# Altium PCB Wi_Drive_V1.5PcbDoc.PcbDoc
Units mil, origin at the board's own origin, x right, y up, seen from the top; angles counter-clockwise.
Board outline 668.38 x 1498.54 mil, 4 copper layers (Top Layer 1, GND, PWR, Bottom Layer 1), stack 39.337 mil thick; 50 components, 43 nets, 218 pads, 261 vias.
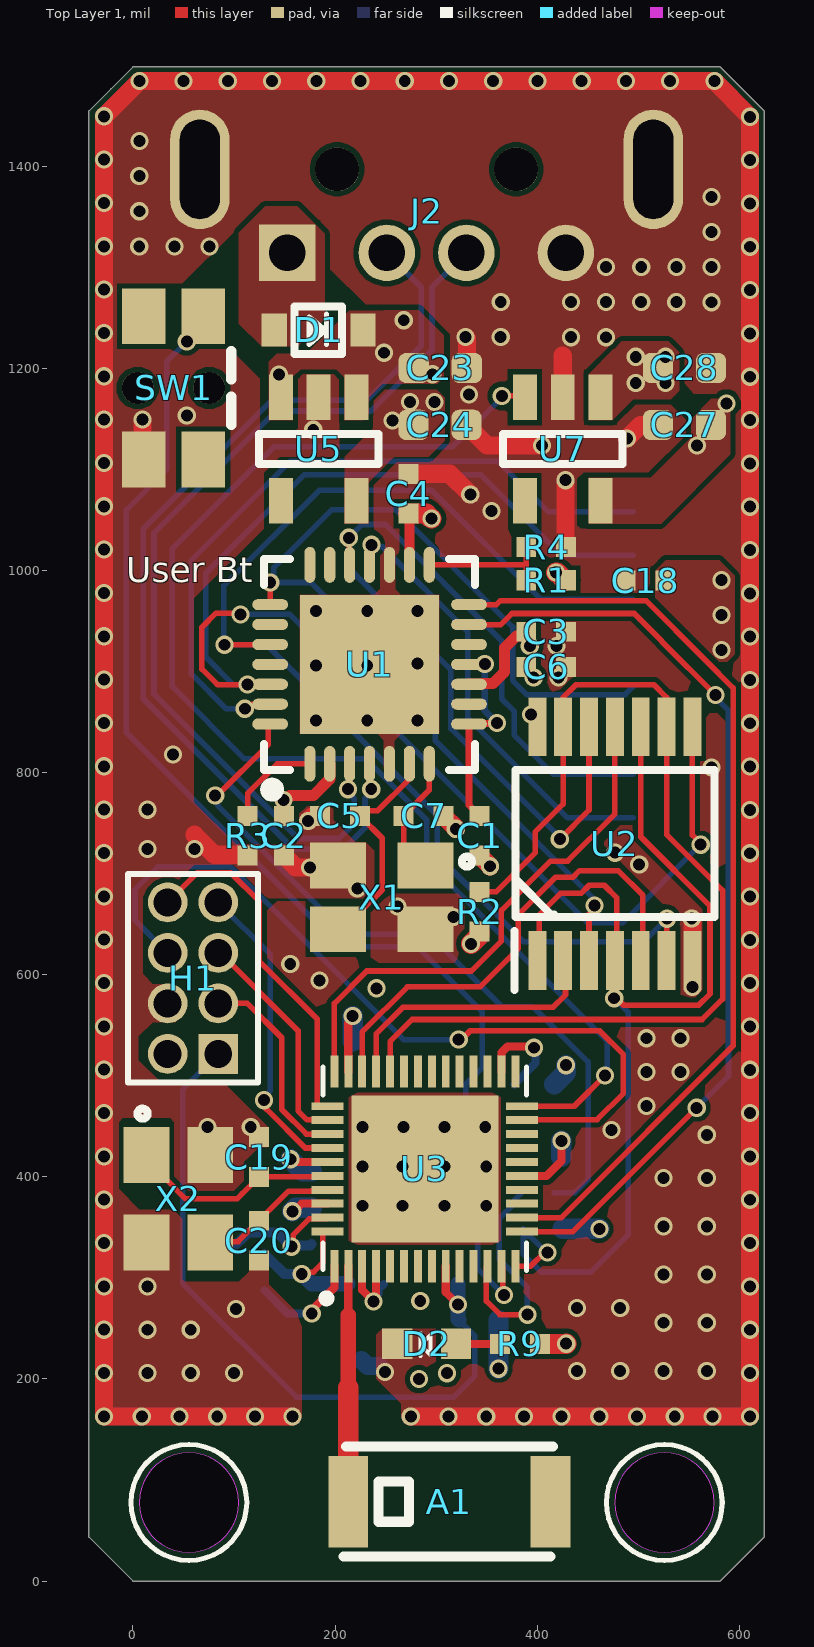
[diagram p0: Top Layer 1 view]
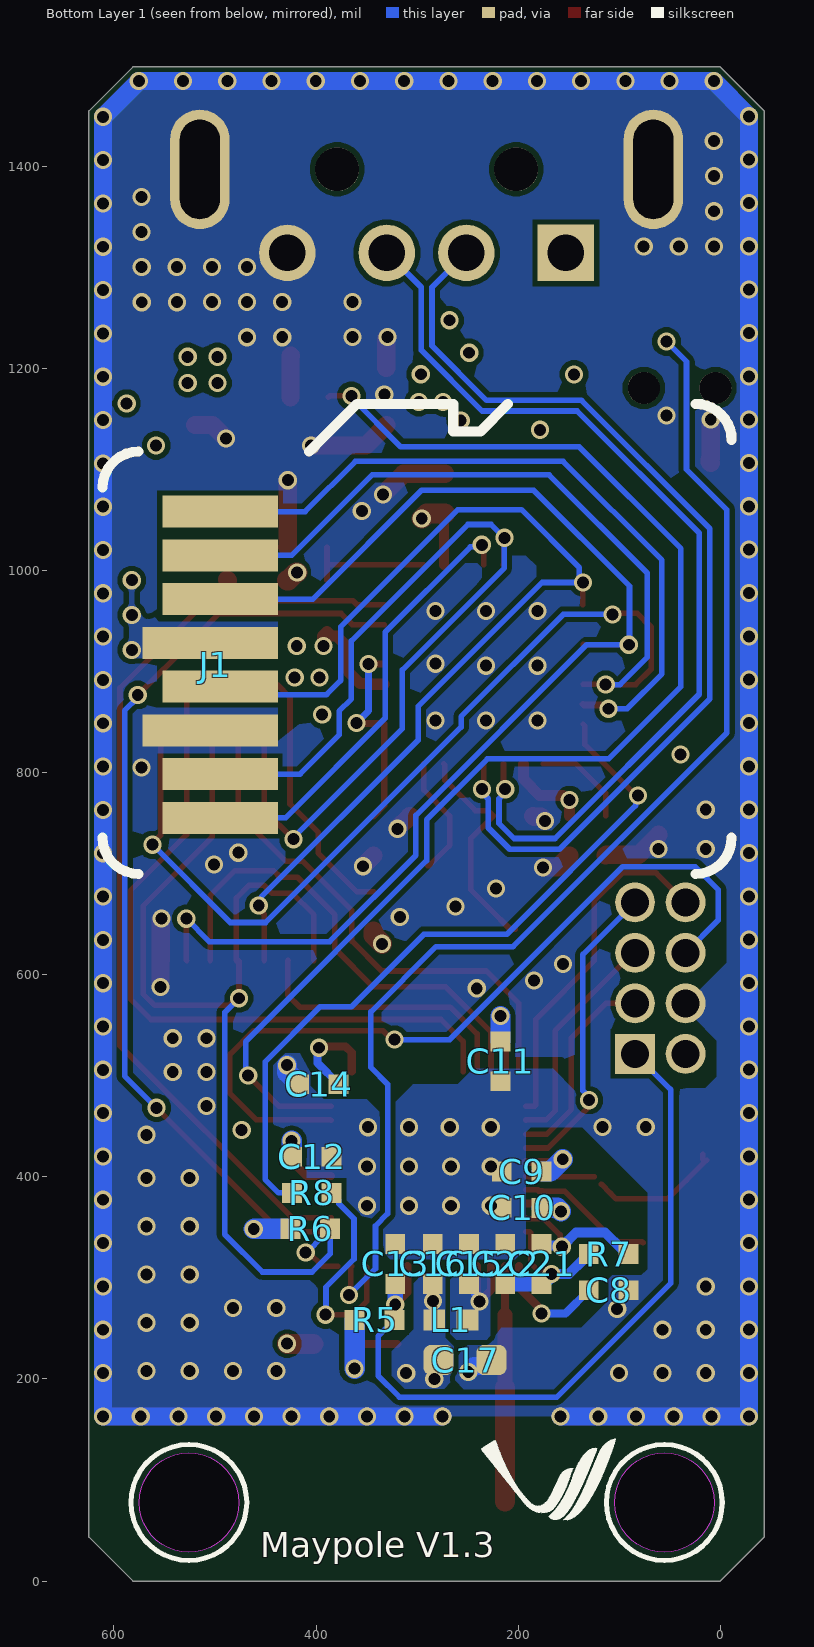
[diagram p1: Bottom Layer 1 view, seen from below]
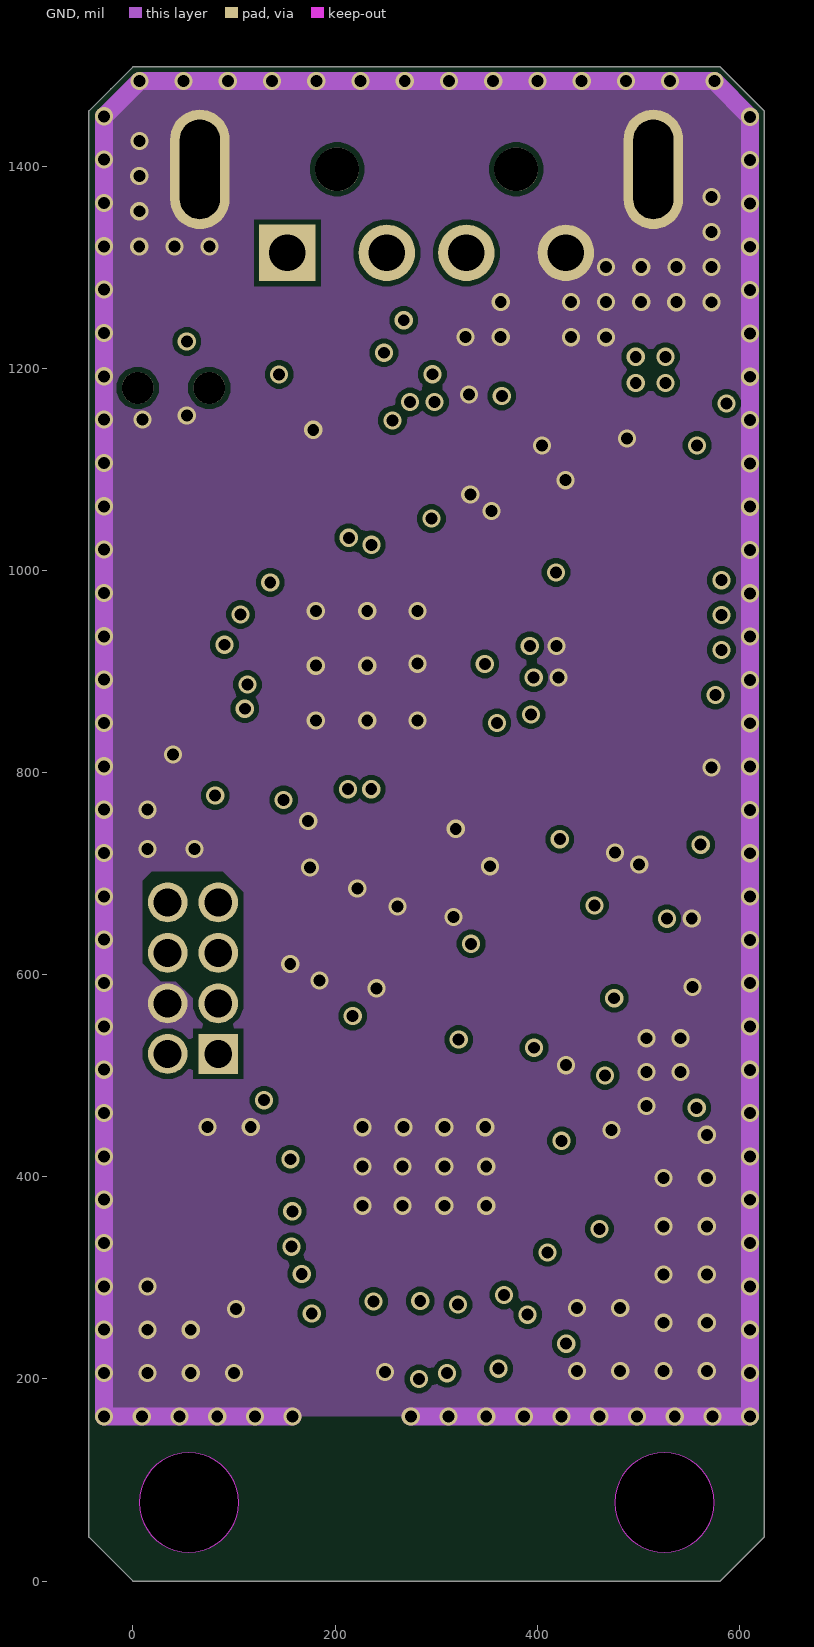
[diagram p2: GND]
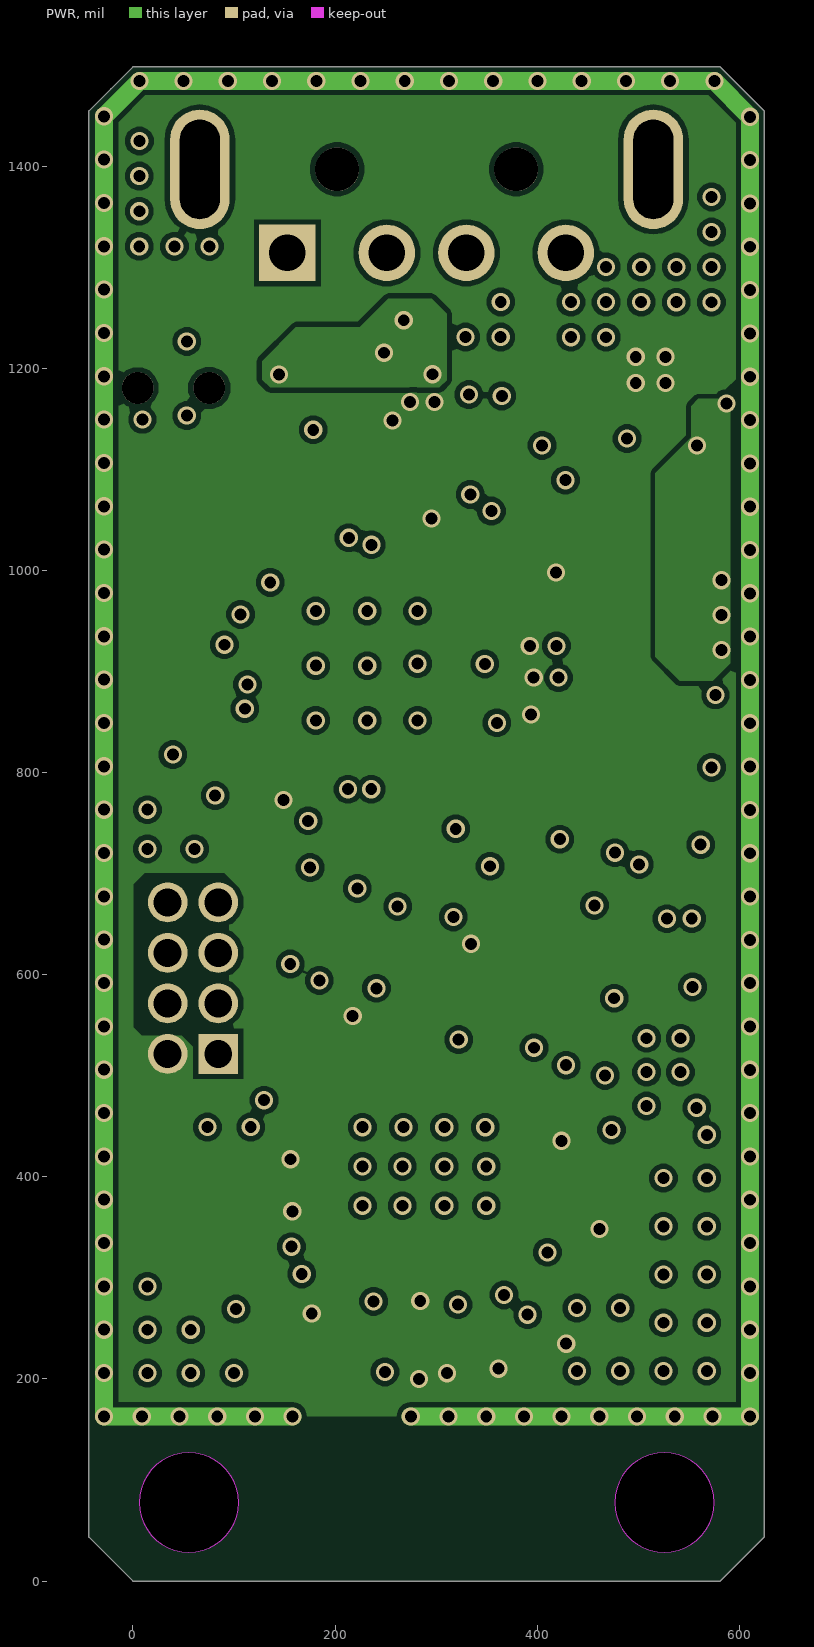
[diagram p3: PWR]
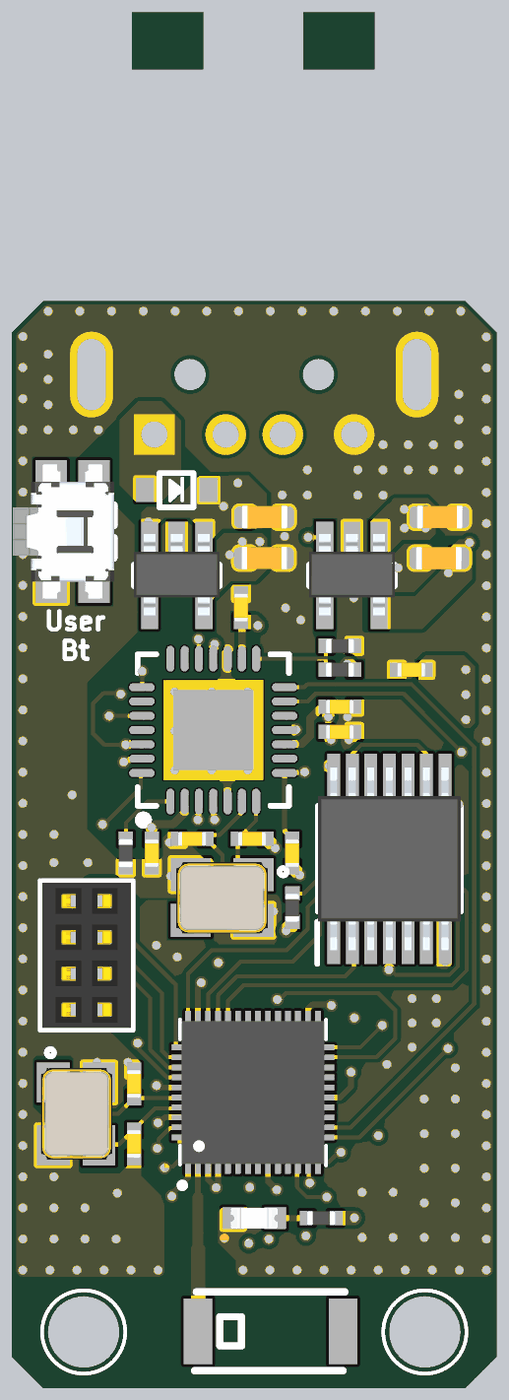
[diagram p4: 3D render of the assembled board from above, using the file's embedded part models]
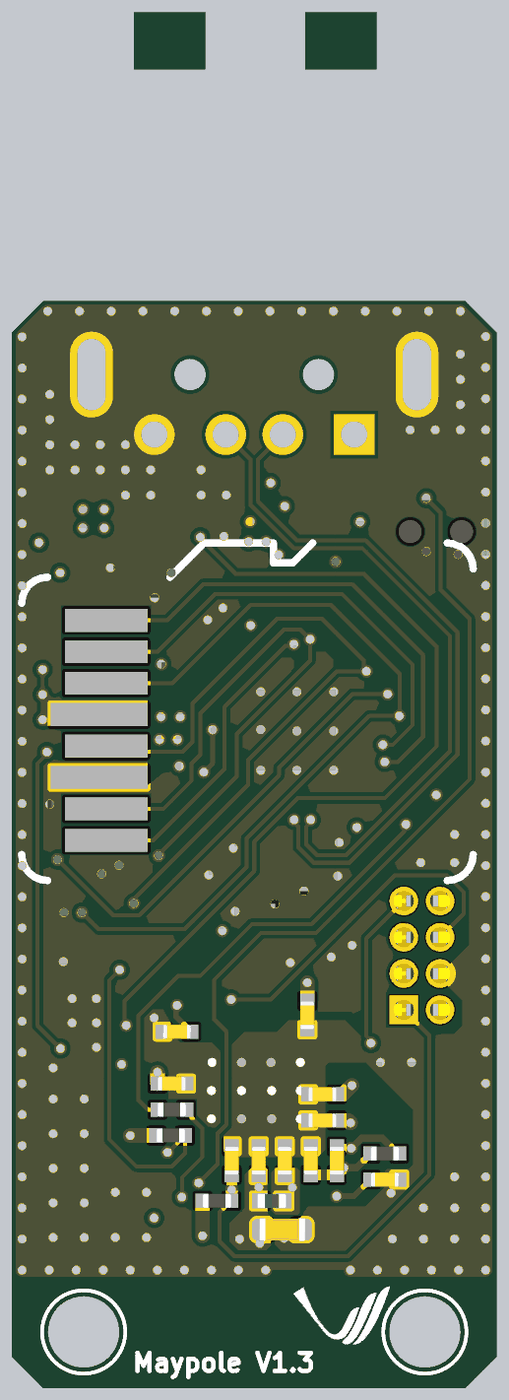
[diagram p5: 3D render of the assembled board from below, using the file's embedded part models]

## Layer stack, top to bottom
Top Solder: solder mask 0.4, Solder Resist, Dk 3.8
Top Layer 1: signal copper 1.378
Dielectric 2: prepreg 3.913, PP-006, Dk 4.1
GND: signal copper 0.598
Dielectric 1: dielectric 27.559, FR-4, Dk 4.6
PWR: signal copper 0.598
Dielectric 3: prepreg 3.913, PP-006, Dk 4.1
Bottom Layer 1: signal copper 1.378
Bottom Solder: solder mask 0.4, Solder Resist, Dk 3.8

## Board outline
-43.59,43.59 -43.59,1454.95 -21.79,1476.75 0,1498.54 581.21,1498.54 624.79,1454.95 624.79,43.59 581.21,0 0,0
cut-out: 476.67,77.75 ccw(c525.88,77.75) 525.88,28.54 ccw(c525.88,77.75) 575.09,77.75 ccw(c525.88,77.75) 525.88,126.97 ccw(c525.88,77.75)
cut-out: 6.11,77.75 ccw(c55.32,77.75) 55.32,28.54 ccw(c55.32,77.75) 104.53,77.75 ccw(c55.32,77.75) 55.32,126.97 ccw(c55.32,77.75)
cut-out: 121.87,1817.99 121.87,1896.73 220.29,1896.73 220.29,1817.99
cut-out: 358.09,1817.99 358.09,1896.73 456.51,1896.73 456.51,1817.99

## Design rules (kind name [scope] priority, off if disabled: settings)
BoardOutlineClearance [All] p1: gap=5 ignorepadtopadclearanceinfootprint=FALSE
Clearance [All] p1: gap=5 ignorepadtopadclearanceinfootprint=FALSE
DiffPairsRouting DiffPairs_usb [InDifferentialPairClass('USB')] p1: maxlimit=10 minlimit=5 mostfreqgap=10 toplayer_maxgap=5 toplayer_prefgap=5 toplayer_minwidth=5.6 toplayer_maxwidth=5.6 toplayer_prefwidth=5.6 bottomlayer_maxgap=5 bottomlayer_prefgap=5 bottomlayer_minwidth=5.6 bottomlayer_maxwidth=5.6 bottomlayer_prefwidth=5.6 impedanceprofiledriven=TRUE impedanceprofileid={67B5BE60-626A-4F86-828E-9287B560A71A} impedanceprofilevalue=90.000000 maxuncoupledlength=500
MatchedLengths MatchedLengths_SD [InxSignalClass('SD_card')] p1: tolerance=1000 checknetsindiffpair=FALSE checkdiffpairvsdiffpair=TRUE checkxsignals=TRUE checkothers=TRUE
MatchedLengths DiffPair_usb [InDifferentialPairClass('USB')] p2: tolerance=1000 checknetsindiffpair=TRUE checkdiffpairvsdiffpair=FALSE checkxsignals=FALSE checkothers=FALSE
MinimumSolderMaskSliver [All] p1: minsoldermaskwidth=0
PolygonConnect [All] p1: connectstyle=Direct reliefconductorwidth=10 reliefentries=4 polygonreliefangle="90 Angle" airgapwidth=10
RoutingVias [All] p1: holewidth=28 width=50 viastyle="Through Hole" minholewidth=11.81 minwidth=17.99 maxholewidth=28 maxwidth=50
SilkToSolderMaskClearance [IsPad] p1: minsilkscreentomaskgap=0 clearancetoexposedcopper=TRUE
SolderMaskExpansion [All] p1: expansion=4 istentingtop=FALSE
Width Width_sd [Not InNetClass('USB')] p1: maxlimit=20 minlimit=5.5 preferedwidth=10 toplayer_prefwidth=5.5 bottomlayer_prefwidth=5.5 impedanceprofiledriven=TRUE impedanceprofileid={71BB4B25-FDDE-479C-ABF6-678D2CCB89EB} impedanceprofilevalue=50.000000 minimp=50.000000 maximp=50.000000 favimp=50.000000
27 further rules are at their usual default settings.

## Classes and differential pairs
differential pair class USB: USB
net class USB: USB_N USB_P
net class SD_Card: SD_CLK SD_CS/D3 SD_D1 SD_D2 SD_MISO/D0 SD_MOSI/CMD
component class Microcontroller: A1 C1 C2 C3 C4 C5 C6 C7 C8 C9 C10 C11 C12 C13 C14 C15 C16 C17 C18 C19 C20 C21 C22 H1 J1 L1 R1 R2 R3 R4 R5 R6 R7 R8 SW1 U1 U2 U3 X1 X2
component class "Maypole Power": C23 C24 C27 C28 D1 D2 J2 R9 ss U5 U7
differential pair USB: +USB_P -USB_N

## Components (designator, comment, footprint, x,y, rotation, side; value= is the part's Value field where it differs from the comment)
A1 "Ant" ANT-SMD_L5.2-W2.1 313.09,78.68 r0 top
C1 "" CAPC0402 343.1,737.64 r270 top value=1uF
C2 "" CAPC0402 149.33,737.64 r270 top value=100nF
C3 "" CAPC0402 408.87,939.55 r0 top value=100nF
C4 "" CAPC0402 272.51,1076.16 r90 top value=100nF
C5 "" CAPC0402 204.88,757.32 r180 top value=22pF
C6 "" CAPC0402 408.87,904.69 r0 top value=100nF
C7 "" CAPC0402 287.56,757.32 r0 top value=22pF
C8 "" CAPC0402 110.4,287.78 r180 bottom value=100nF
C9 "" CAPC0402 196.57,405.29 r0 bottom value=100nF
C10 "" CAPC0402 196.57,369.42 r0 bottom value=100nF
C11 "" CAPC0402 217.46,514.32 r270 bottom value=100nF
C12 "" CAPC0402 404.29,420 r180 bottom value=100nF
C13 "" CAPC0402 321.65,313.88 r90 bottom value=100nF
C14 "" CAPC0402 397.29,491.73 r0 bottom value=1uF
C15 "" CAPC0402 248.61,313.88 r90 bottom value=100nF
C16 "" CAPC0402 284.47,313.88 r90 bottom value=100nF
C17 "" CAPC0603 252.56,218.74 r180 bottom value=10uF
C18 "" CAPC0402 507.11,990.26 r180 top value=100nF
C19 "" CAPC0402 124.72,419.65 r90 top value=10pF
C20 "" CAPC0402 124.72,336.98 r270 top value=10pF
C21 "" CAPC0402 176.88,313.88 r270 bottom value=3.3nF
C22 "" CAPC0402 212.75,313.88 r90 bottom value=10nF
C23 "" CAPC0603 304.22,1200.65 r0 top value=10uF
C24 "" CAPC0603 303.93,1144.25 r0 top value=10uF
C27 "" CAPC0603 545.81,1144.22 r180 top value=10uF
C28 "" CAPC0603 545.81,1200.65 r0 top value=10uF
D1 "" SOD-323 183.73,1238.26 r0 top
D2 "" LED_0603 290.6,234.74 r180 top locked
H1 "Header 8" HEADER_1X08_2.0 59.34,596.71 r90 top
J1 "DM3AT-SF-PEJM5(40)" 473521001 497.83,906.9 r90 bottom
J2 "" Molex_48037-0001_0 290.6,1355.84 r180 top locked
L1 "" IND_0402 266.49,258.43 r0 bottom
R1 "" RESC0402 408.87,990.41 r180 top value=10k
R2 "" RESC0402 343.1,662.41 r270 top value=10K
R3 "" RESC0402 113.47,737.64 r90 top value=680E
R4 "" RESC0402 408.87,1023.28 r180 top value=10k
R5 "" RESC0402 342.1,258.47 r0 bottom value=10K
R6 "" RESC0402 405.74,348.6 r0 bottom value=10K
R7 "" RESC0402 110.4,323.64 r180 bottom value=20K
R8 "" RESC0402 404.29,384.14 r0 bottom value=0E
R9 "" RESC0402 383,234.74 r0 top value=2K
SW1 "Button" "RIGHT ANGLE PUSH BUTTON SMD" 40.14,1180.8 r270 top locked
U1 "" AU6465RB63-GCF-GR 234.17,907.26 r0 top
U2 "" 74ABT125PW 476.94,729.86 r90 top
U3 "" QFN48_5X5 288.88,407.93 r90 top
U5 "" SOT25 183.73,1120.45 r270 top
U7 "" SOT25 425.31,1120.45 r270 top
X1 "" CRYSTAL_3225 246.22,676.6 r180 top
X2 "" Crystal_3225 44.92,378.32 r270 top

## Footprints (in the part's own frame and the unit in brackets; to place one, negate y for a bottom-side part, rotate by r counter-clockwise, add the part's x,y. Pads: shape width x height; smd on the part's side, far side on the other; paste and mask are expansions set on the pad)
74ABT125PW [mm]
  rect 1.475x0.45 smd: 1(-2.938,1.95) 2(-2.938,1.3) 3(-2.938,0.65) 4(-2.938,0) 5(-2.938,-0.65) 6(-2.938,-1.3) 7(-2.938,-1.95) 8(2.938,-1.95) 9(2.938,-1.3) 10(2.938,-0.65) 11(2.938,0) 12(2.938,0.65) 13(2.938,1.3) 14(2.938,1.95)
  silkscreen extent -3.67,-2.5 1.85,2.52, body extent -3.2,-2.5 3.2,2.5, height 1.1
473521001 [mm]
  rect 0.8x2.9 smd: 1(3.849,-0.075) 2(2.75,-0.075) 3(1.65,-0.075) 5(-0.55,-0.075) 7(-2.75,-0.075) 8(-3.849,-0.075)
  rect 0.8x3.4 smd: 4(0.55,0.175) 6(-1.65,0.175)
  silkscreen extent -5.26,-12.93 6.56,2.88, body extent -4.89,-12.57 6.11,2.43, height 1
ANT-SMD_L5.2-W2.1 [mm]
  rect 1x2.3 smd: 1(-2.54,0) 2(2.54,0)
  silkscreen extent -2.66,-1.38 2.6,1.38, body extent -2.6,-1.05 2.6,1.05, height 1
AU6465RB63-GCF-GR [mm]
  oval 0.28x0.9 smd paste-100 mask+0.051: 1(-1.501,-2.5) 2(-1.001,-2.5) 3(-0.501,-2.5) 4(0,-2.5) 5(0.5,-2.5) 6(1.001,-2.5) 7(1.501,-2.5) 15(1.501,2.5) 16(1.001,2.5) 17(0.5,2.5) 18(0,2.5) 19(-0.501,2.5) 20(-1.001,2.5) 21(-1.501,2.5)
  oval 0.9x0.28 smd paste-100 mask+0.051: 8(2.5,-1.501) 9(2.5,-1.001) 10(2.5,-0.501) 11(2.5,0) 12(2.5,0.5) 13(2.5,1.001) 14(2.5,1.501) 22(-2.5,1.501) 23(-2.5,1.001) 24(-2.5,0.5) 25(-2.5,0) 26(-2.5,-0.501) 27(-2.5,-1.001) 28(-2.5,-1.501)
  rect 3.5x3.5 smd paste-100 mask+0.051: 29(0,0)
  silkscreen extent -2.65,-3.3 2.65,2.65, body extent -2.65,-2.65 2.65,2.65, height 0.8
CAPC0402 [mm]
  rect 0.5x0.5 smd: 1(-0.5,0) 2(0.5,0)
  body extent -0.5,-0.25 0.5,0.25, height 0.56
CAPC0603 [mil]
  rrect50% 30x30 smd: 1(-26.26,0) 2(26.26,0)
  body extent -31,-16 32,16, height 34
CRYSTAL_3225 [mm] "3225 pack"
  rect 1.4x1.15 smd: 1(-1.1,-0.8) 2(1.1,-0.8) 3(1.1,0.8) 4(-1.1,0.8)
  silkscreen extent -2.27,-1.03 -2.01,-0.77, body extent -1.6,-1.23 1.6,1.27, height 0.6
Crystal_3225 [mm] "3225 pack"
  rect 1.4x1.15 smd: 1(-1.1,-0.8) 2(1.1,-0.8) 3(1.1,0.8) 4(-1.1,0.8)
  silkscreen extent -2.27,-1.03 -2.01,-0.77, body extent -1.6,-1.23 1.6,1.27, height 0.6
HEADER_1X08_2.0 [mm]
  rect 1x1 hole 0.7 paste+0 mask+0.05: 1(-1.905,-0.635)
  round 1 hole 0.7 paste+0 mask+0.05: 2(-1.905,0.635) 3(-0.635,-0.635) 4(-0.635,0.635) 5(0.635,-0.635) 6(0.635,0.635) 7(1.905,-0.635) 8(1.905,0.635)
  silkscreen extent -2.62,-1.64 2.62,1.63, body extent -2.54,-1.55 2.54,1.55, height 4.4
IND_0402 [mm]
  rect 0.55x0.53 smd: 1(0.419,0) 2(-0.419,0)
  body extent -0.5,-0.25 0.5,0.25, height 0.55
LED_0603 [mil]
  rect 30x30 smd: A(-29.02,0) K(29.02,0)
  silkscreen extent -4,-11 6,12, body extent -32,-14 32,14, height 25
Molex_48037-0001_0 [mm]
  rect 1.42x1.42 hole 0.92 paste-1000 mask+0: 1(3.5,1.05)
  round 1.42 hole 0.92 paste-1000 mask+0: 2(1,1.05) 3(-1,1.05) 4(-3.5,1.05)
  oval 1.5x3 hole 1 slot 2.5 at 90 deg paste-1000 mask+0: 5(-5.7,-1.05) 6(5.7,-1.05)
  round 1.1 hole 1.1 unplated paste-1000 mask+0: ""(-2.25,-1.05) ""(2.25,-1.05)
  body extent -6.3,-18.76 6.3,1.16, height 3
QFN48_5X5 [mm] "Esp32 dowd SoC"
  rect 0.81x0.2 smd: 1(-2.445,2.275) 2(-2.445,1.925) 3(-2.445,1.575) 4(-2.445,1.225) 5(-2.445,0.875) 6(-2.445,0.525) 7(-2.445,0.175) 8(-2.445,-0.175) 9(-2.445,-0.525) 10(-2.445,-0.875) 11(-2.445,-1.225) 12(-2.445,-1.575) 13(-2.445,-1.925) 14(-2.445,-2.275) 25(2.445,-2.275) 26(2.445,-1.925) 27(2.445,-1.575) 28(2.445,-1.225) 29(2.445,-0.875) 30(2.445,-0.525) 31(2.445,-0.175) 32(2.445,0.175) 33(2.445,0.525) 34(2.445,0.875) 35(2.445,1.225) 36(2.445,1.575) 37(2.445,1.925) 38(2.445,2.275)
  rect 0.2x0.81 smd: 15(-1.575,-2.445) 16(-1.225,-2.445) 17(-0.875,-2.445) 18(-0.525,-2.445) 19(-0.175,-2.445) 20(0.175,-2.445) 21(0.525,-2.445) 22(0.875,-2.445) 23(1.225,-2.445) 24(1.575,-2.445) 39(1.575,2.445) 40(1.225,2.445) 41(0.875,2.445) 42(0.525,2.445) 43(0.175,2.445) 44(-0.175,2.445) 45(-0.525,2.445) 46(-0.875,2.445) 47(-1.225,2.445) 48(-1.575,2.445)
  rect 3.7x3.7 smd paste-3: 49(0,0)
  silkscreen extent -3.35,-2.56 2.56,2.57, body extent -2.5,-2.5 2.5,2.5, height 0.9
RESC0402 [mm]
  rect 0.5x0.508 smd: 1(0.5,0) 2(-0.5,0)
  body extent -0.5,-0.25 0.5,0.25, height 0.4
"RIGHT ANGLE PUSH BUTTON SMD" [mm]
  rect 1.4x1.1 smd: 1(-1.8,0.75) 2(1.8,0.75) 3(-1.8,-0.75) 4(1.8,-0.75)
  round 0.8 hole 0.8 unplated: ""(0,0.9) ""(0,-0.9)
  silkscreen extent -0.92,1.45 0.92,1.45, body extent -2.35,-2.1 2.35,1.45, height 1.35
SOD-323 [mm]
  rect 0.63x0.83 smd: A(-1.115,0) K(1.115,0)
  silkscreen extent -0.61,-0.61 0.58,0.58, body extent -1.25,-0.62 1.25,0.63, height 0.99
SOT25 [mm]
  rect 1.15x0.6 smd: 1(-1.3,0.95) 2(-1.3,0) 3(-1.3,-0.95) 4(1.3,-0.95) 5(1.3,0.95)
  silkscreen extent -0.38,-1.5 0.38,1.5, body extent -1.45,-1.5 1.4,1.5, height 1.3

## Part data
A1: "SMD,2.1x5.2mm Antennas ROHS", Case/Package=SMD, Manufacturer Part Number=SLDA52-2R710G-S1TF
C1 C14: library part Cap, "CAP CER 1uF 6.3V X7R 0402", Case/Package=0402, Dielectric=X7R, Voltage=6.3V
C2 C3 C4 C6 C8 C9 C10 C11 C12 C13 C15 C16 C18: library part Cap, "CAP CER 100nF 6.3V X7R 0402", Case/Package=0402, Dielectric=X7R, Voltage=6.3V
C5 C7: library part Cap, "CAP CER 22pF 50V X7R 0402", Case/Package=0402, Dielectric=X7R, Voltage=50V, DNP=DNP
C17 C23 C24 C27 C28: library part Cap, "CAP CER 10uF 6.3V X7R 0603", Case/Package=0603, Dielectric=X7R, Voltage=6.3V
C19 C20: library part Cap, "CAP CER 10pF 50V X7R 0402", Case/Package=0402, Dielectric=X7R, Voltage=50V
C21: library part Cap, "CAP CER 3.3nF 6.3V X7R 0402", Case/Package=0402, Dielectric=X7R, Voltage=6.3V
C22: library part Cap, "CAP CER 10nF 6.3V X7R 0402", Case/Package=0402, Dielectric=X7R, Voltage=6.3V
D1: library part B5817WS, "20V 1A 450mV @ 1A SOD-323 Schottky Barrier Diodes (SBD) RoHS", Case/Package=SOD-323, Manufacturer Part Number=B5817WS
D2: library part LED1, "LED, RED,SMD, 0603", Case/Package=0603, Manufacturer Part Number="LED, RED,SMD, 0603"
H1: "Header, 08-Pin,2mm", Case/Package=TH, Manufacturer Part Number="1.27mm PITCH", LatestRevisionDate=17-Jul-2002
J1: "Micro SD Memory Card Socket", Case/Package=SMD
J2: library part "USB MALE", "USB A-type Plug Male PCB R/A", Case/Package=TH, Manufacturer Part Number=USB-05
L1: library part Inductor, "2nH ±0.3nH 900mA 120mΩ 0402 Inductors (SMD) RoHS", Case Code (Imperial)=0402, Case Code (Metric)=1005, Current=900mA, DC Resistance (DCR)=120mR, Inductance=2nH, Manufacturer 1=Murata, Manufacturer Part Number=LQG15HN2N0S02D, Max Operating Temperature=125°C, Min Operating Temperature=-55°C, Package Quantity=10000, Self Resonant Frequency=6GHz, Supplier Part Number 1=C97984, Test Frequency=100MHz, Case/Package=0402, Category 1="Fixed Inductors", ComponentLink1Description=https://datasheet.ciiva.com/11799/0900766b8090d3b8-11799042.pdf?src-supplier=RSComponents, ComponentLink1URL=https://datasheet.ciiva.com/11799/0900766b8090d3b8-11799042.pdf?src-supplier=RSComponents, ComponentLink2Description=https://datasheet.ciiva.com/4976/o05e-4976477.pdf?src-supplier=Mouser, ComponentLink2URL=https://datasheet.ciiva.com/4976/o05e-4976477.pdf?src-supplier=Mouser, ComponentLink3Description=https://datasheet.ciiva.com/8510/l0075s0083lqg15hn-8510907.pdf?src-supplier=Avnet, ComponentLink3URL=https://datasheet.ciiva.com/8510/l0075s0083lqg15hn-8510907.pdf?src-supplier=Avnet, ComponentLink4Description=https://datasheet.ciiva.com/17279/l0075s0083lqg15hn-17279196.pdf?src-supplier=Avnet+Europe, ComponentLink4URL=https://datasheet.ciiva.com/17279/l0075s0083lqg15hn-17279196.pdf?src-supplier=Avnet+Europe, Core Material=Air, Current Rating=900mA, DC Current=900mA, Depth=0.55mm, Description 1="Fixed Inductors 0402 2.0nH", Height=0.5mm, Height - Seated (Max)=0.022inch, Length=1mm, Max DC Current=900mA, Military Standard=Not, Mount="Surface Mount", Number of Pins=2, Packaging="Tape and Reel", Pricing 1="50=0.00840, 500=0.00620, 1500=0.00580, 5000=0.00540, 25000=0.00520, 50000=0.00520, 50=0.00810, 500=0.00600, 1500=0.00560, 5000=0.00520, 25000=0.00500, 50000=0.00500, 50=0.04180, 500=0.03090, 1500=0.02890, 5000=0.02690, 25000=0.02600, 50000=0.02550, 50=0.03860, 500=0.02850, 1500=0.02670, 5000=0.02480, 25000=0.02400, 50000=0.02360, 50=0.00520, 500=0.00380, 1500=0.00360, 5000=0.00330, 25000=0.00320, 50000=0.00320, 50=0.00480, 500=0.00350, 1500=0.00330, 5000=0.00310, 25000=0.00300, 50000=0.00290, 50=0.04770, 500=0.03530, 1500=0.03300, 5000=0.03070, 25000=0.02970, 50000=0.02920, 50=0.65070, 500=0.48080, 1500=0.44960, 5000=0.41830, 25000=0.40450, 50000=0.39760, 50=0.02550, 500=0.01880, 1500=0.01760, 5000=0.01640, 25000=0.01580, 50000=0.01560, 50=0.46320, 500=0.34230, 1500=0.32010, 5000=0.29780, 25000=0.28800, 50000=0.28310, 50=0.05400, 500=0.03990, 1500=0.03730, 5000=0.03470, 25000=0.03360, 50000=0.03300, 50=0.00840, 500=0.00620, 1500=0.00580, 5000=0.00540, 25000=0.00520, 50000=0.00510, 50=0.00616, 500=0.00455, 1500=0.00426, 5000=0.00396, 25000=0.00383, 50000=0.00376 (AUD)", Q Factor=8, Radiation Hardening=No, REACH SVHC="No SVHC", RoHS 1=Yes, Shielding=Unshielded, Stock 1=84500, Supplier 1=LCSC, Termination=SMD/SMT, Width=0.02inch
R1 R4: library part Resistor, "Thick Film Resistor -  10kohm, 1%, 0402", Case/Package=0402, DNP=DNP
R2 R5 R6: library part Resistor, "Thick Film Resistor -  10Kohm, 1%, 0402", Case/Package=0402
R3: library part Resistor, "Thick Film Resistor -  680ohm, 1%, 0402", Case/Package=0402
R7: library part Resistor, "Thick Film Resistor -  20Kohm, 1%, 0402", Case/Package=0402
R8: library part Resistor, "Thick Film Resistor -  0ohm, 1%, 0402", Case/Package=0402
R9: library part Resistor, "Thick Film Resistor -  2Kohm, 1%, 0402", Case/Package=0402
SW1: "6mm 5mm Round Button 50mA Straight 6mm SPST 12V Plugin Tactile Switches ROHS", Case/Package=SMD, Manufacturer Part Number=TS-1809SM-C
U1: library part AU6465RB63-GCF-GR, "Controller QFN-28-EP(5x5) USB ICs ROHS", Case/Package=QFN-28-EP(5x5), Manufacturer Part Number=AU6465RB63-GCF-GR
U2: library part 74ABT125PW_112, "Buffers & Line Drivers QUAD BUFFER 3-S", Case/Package=14-TSSOP, Manufacturer Part Number=74ABT125PW,112, Manufacturer_Name=Nexperia
U3: library part ESP32-D0WD, "MCU Bluetooth, WiFi - 2.4GHz 48-QFN", Case/Package=48-QFN, Manufacturer="Espressif Systems", Manufacturer Part Number=ESP32U4WDH
U5 U7: library part LDO_5V_3V, "LDO Voltage Regulators 600mA CMOS LDO 50mA 3.3V 250mV", Case/Package=SOT-23-5, Manufacturer Part Number=AP2112K-3.3TRG1
X1: library part "CRYSTAL (7M-25.000MEEQ-T)", "12MHz ±25ppm Crystal 12pF 120 Ohms 4-SMD, No Lead", Case/Package=SMD/SMT, Manufacturer Part Number=ECS-120-20-33-TR, ComponentLink1Description=https://www.verical.com/server-webapp/html/getDatasheet?partID=757227&src-supplier=Verical, ComponentLink1URL=https://www.verical.com/server-webapp/html/getDatasheet?partID=757227&src-supplier=Verical, ComponentLink2Description=http://www.txccrystal.com/images/pdf/7m-accuracy.pdf?src-supplier=Digi-Key, ComponentLink2URL=http://www.txccrystal.com/images/pdf/7m-accuracy.pdf?src-supplier=Digi-Key, ComponentLink3Description=http://www.farnell.com/datasheets/1794111.pdf?src-supplier=Element14, ComponentLink3URL=http://www.farnell.com/datasheets/1794111.pdf?src-supplier=Element14, ComponentLink4Description=http://www.mouser.com/ds/2/417/7m-11184.pdf?src-supplier=Mouser, ComponentLink4URL=http://www.mouser.com/ds/2/417/7m-11184.pdf?src-supplier=Mouser, DNP=DNP
X2: library part CRYSTAL_1_1, "40MHz ±10ppm 10pF 30Ω SMD-3225 SMD Crystal Resonators RoHS", Case/Package=SMD-3225, Frequency=40MHz, Manufacturer Part Number=7M40000049

## Via types
v1: diameter 17.99, hole 11.81, Top Layer 1 to Bottom Layer 1, tented both sides, 261 vias

## Nets (pads, with @x,y where several pads share a name; then routed paths per layer and width w, separated by ;. In a path a pad name is that pad's centre, name@x,y a point inside that pad or via, vN(x,y) a via of type N, cw(c..) or ccw(c..) an arc to the next point about the centre after c; other vN are vias at no path point)
3V3: C2.1 C3.1 C4.1 C6.1 C8.1 C9.1 C10.1 C11.1 C12.1 C16.1 C17.1 C24.1 C28.1 H1.2 L1.1 R1.2 R2.1 R5.1 R6.1 R9.1 U1.2 U1.10 U1.16 U2.14 U3.1 U3.19 U3.37 U3.43 U3.46 U5.5 U7.1 | length 799
  Top Layer 1 w8: v1(155.88,417.5) 158.59,417.5 161.26,414.82 U3.43 ; v1(157.73,365.95) 159.5,365.95 167.03,373.48 U3.46 ; v1@176.94,268.25 199.31,290.62 U3.1 ; U3.37 213.09,552.07 217.46,556.44 v1(217.46,559.14) ; U3.19 409.4,401.04 424.15,415.79 v1(424.15,435.73)
  Top Layer 1 w10: U1.16 C4.1@273.56,1052.09
  Top Layer 1 w11: v1(149.14,773.09) 149.33,772.9 v1@149.33,771.56 ; C2.1 v1@149.33,771.56 ; U1.2 194.76,793.68 178.75,777.67 155.61,777.67 149.51,771.56 v1@149.33,771.56 ; U1.10 344.8,887.55 345.5,888.25 356.31,888.25 367.73,899.67 367.73,923.27 379.67,935.21 384.84,935.21 C3.1 393.42,935.32 393.42,926.79 v1@394.76,925.45
  Top Layer 1 w20: C4.1 290.44,1056.47 v1(295.42,1051.5) ; v1(334.66,630.72) 343.1,639.16 R2.1 ; R9.1 428.54,234.74 v1(428.74,234.93) ; v1(418.68,998.28) 419.69,998.28 427.55,990.41 R1.2
  Bottom Layer 1 w8: C8.1 153.04,264.82 v1(176.94,264.82)
  Bottom Layer 1 w20: v1(155.88,417.5) 168.09,405.29 C9.1 ; v1(157.73,365.95) 161.2,369.42 C10.1 ; C11.1 v1(217.46,559.14) ; v1(361.81,210.22) R5.1 ; C12.1 423.97,435.56 v1(424.15,435.73) ; R6.1 461.54,348.6 v1(461.67,348.46)
  other v1: 282.99,199.86 310.81,205.74 284.32,277.19 393.91,857.53 396.6,894.12 392.76,925.45 256.81,1148.73 274.24,1166.93 298.31,1166.93 497.58,1185.65 527.05,1185.65 497.58,1211.65 527.05,1211.65
BOOT: H1.6 U3.23 | length 802.6
  Top Layer 1 w5.5: v1(322.35,535.88) 325.07,535.88 333.82,544.63 461.8,544.63 485.27,521.16 485.27,482.71 459.29,456.73 385.71,456.73 U3.23
  Bottom Layer 1 w5.5: H1.6 2.03,654.02 2.03,684.38 24.77,707.12 96.45,707.12 267.7,535.88 v1(322.35,535.88)
EN: C13.1 H1.1 R5.2 U3.9 | length 727.3
  Top Layer 1 w8: U3.9 309.55,285.82 v1(321.65,273.71)
  Bottom Layer 1 w5.5: H1.1 49.15,486.52 49.15,294.67 161.71,182.11 317.55,182.11 338.43,202.98 338.43,242.46 R5.2
  Bottom Layer 1 w15: C13.1 v1(321.65,273.71) 321.65,259.23 R5.2
ESP_CLK: U2.2 U3.35 | length 275
  Top Layer 1 w5.5: U3.35 240.65,541.52 267.05,567.91 415.88,567.91 428.09,580.13 428.09,613.86 U2.2@427.76,614.19
ESP_CS: R2.2 U2.9 U2.13 U3.34 | length 1046.8
  Top Layer 1 w5.5: U3.34 254.43,534 276.24,555.81 563.35,555.81 583.54,576 583.54,683.43 528.12,738.85 U2.9 528.12,874.56 515.59,887.1 438.29,887.1 425.76,874.56 U2.13 425.76,769.04 398.03,741.31 398.03,720.7 359.42,682.09 R2.2
ESP_MISO: U2.11 U3.38 | length 526.9
  Top Layer 1 w5.5: U3.38 199.31,571.72 231.4,603.81 335,603.81 364.56,633.37 364.56,663.82 413.27,712.54 430.14,712.54 476.94,759.34 U2.11
ESP_MOSI: U2.5 U3.36 | length 477.4
  Top Layer 1 w5.5: U3.36 226.87,543.33 271.67,588.13 343.55,588.13 381.5,626.07 381.5,659.69 418.38,696.57 435.4,696.57 442.03,703.19 480.17,703.19 504.53,678.83 U2.5@504.53,614.19
EXT_5V: C23.1 D1.K U5.1 U5.3
  other v1: 144.67,1194.27 296.32,1194.4 248.44,1215.69 267.97,1247.81
GND: C1.2 C2.2 C3.2 C4.2 C5.2 C6.2 C7.2 C8.2 C9.2 C10.2 C11.2 C12.2 C13.2 C14.2 C15.2 C16.2 C17.2 C18.2 C19.2 C20.2 C22.2 C23.2 C24.2 C27.2 C28.2 D2.K H1.4 J1.6 J2.4 J2.5 J2.6 R3.2 R4.2 SW1.4 U1.5 U1.17 U1.29 U2.7 U3.49 U5.2 U7.2 X1.2 X1.4 X2.2 X2.4 | length 15681.5
  Top Layer 1 w18: SW1.4@9.39,1106.56 10.61,1107.78 SW1.4 9.39,1111.15 v1@9.39,1145.96 ; 61.03,738.54 80.77,718.8 112.63,718.8 R3.2 ; C2.2 161.18,706.1 v1(175.35,706.1) ; v1(158.01,163.01) v1(120.7,163.01) v1(83.39,163.01) v1(46.08,163.01) v1(8.77,163.01) v1(-28.54,163.01) v1(-28.54,291.67) v1(-28.54,334.56) v1(-28.54,634.79) v1(-28.54,677.67) v1(-28.54,935.01) v1(-28.54,977.9) v1(-28.54,1278.12) v1(-28.54,1321.01) v1(-28.54,1363.9) v1(-28.54,1406.79) v1(-28.54,1449.67) v1(6.33,1484.54) v1(50.11,1484.54) v1(93.88,1484.54) v1(137.66,1484.54) v1(181.43,1484.54) v1(225.21,1484.54) v1(268.98,1484.54) v1(312.76,1484.54) v1(356.53,1484.54) v1(400.31,1484.54) v1(444.08,1484.54) v1(487.86,1484.54) v1(531.63,1484.54) v1(575.41,1484.54) v1(610.79,1449.15) v1(610.79,1406.28) v1(610.79,1363.41) v1(610.79,1320.54) v1(610.79,1277.67) v1(610.79,1234.8) v1(610.79,1191.92) v1(610.79,1149.05) v1(610.79,1106.18) v1(610.79,1063.31) v1(610.79,1020.44) v1(610.79,977.57) v1(610.79,934.69) v1(610.79,891.82) v1(610.79,848.95) v1(610.79,806.08) v1(610.79,763.21) v1(610.79,720.34) v1(610.79,677.47) v1(610.79,634.59) v1(610.79,591.72) v1(610.79,548.85) v1(610.79,505.98) v1(610.79,463.11) v1(610.79,420.24) v1(610.79,377.36) v1(610.79,334.49) v1(610.79,291.62) v1(610.79,248.75) v1(610.79,205.88) v1(610.79,163.01) v1(275,163.01) ; v1(173.4,752.39) 177.49,756.48 184.35,756.48 C5.2 ; C4.2 313.52,1095.84 v1(333.85,1075.48) ; C7.2 319.46,745.1 v1(319.46,744.54) ; v1(329.18,1231.2) 330.48,1229.9 C23.2 ; C24.2 350.46,1123.97 v1(404.93,1123.97) ; C1.2 353.44,707.61 v1(353.44,707.47) ; 424.98,1212.62 425.31,1212.29 U7.2 ; v1(427.96,1089.53) 427.96,1023.87 R4.2 ; C18.2 C18.2@488.26,991.1 ; v1(489.08,1130.78) 502.52,1144.22 C27.2 ; v1(553.03,655.63) 553.71,654.94 U2.7 553.86,614.05 v1(553.88,588.06)
  GND w18: v1(158.01,163.01) v1(120.7,163.01) v1(83.39,163.01) v1(46.08,163.01) v1(8.77,163.01) v1(-28.54,163.01) v1(-28.54,291.67) v1(-28.54,334.56) v1(-28.54,634.79) v1(-28.54,677.67) v1(-28.54,935.01) v1(-28.54,977.9) v1(-28.54,1278.12) v1(-28.54,1321.01) v1(-28.54,1363.9) v1(-28.54,1406.79) v1(-28.54,1449.67) v1(6.33,1484.54) v1(50.11,1484.54) v1(93.88,1484.54) v1(137.66,1484.54) v1(181.43,1484.54) v1(225.21,1484.54) v1(268.98,1484.54) v1(312.76,1484.54) v1(356.53,1484.54) v1(400.31,1484.54) v1(444.08,1484.54) v1(487.86,1484.54) v1(531.63,1484.54) v1(575.41,1484.54) v1(610.79,1449.15) v1(610.79,1406.28) v1(610.79,1363.41) v1(610.79,1320.54) v1(610.79,1277.67) v1(610.79,1234.8) v1(610.79,1191.92) v1(610.79,1149.05) v1(610.79,1106.18) v1(610.79,1063.31) v1(610.79,1020.44) v1(610.79,977.57) v1(610.79,934.69) v1(610.79,891.82) v1(610.79,848.95) v1(610.79,806.08) v1(610.79,763.21) v1(610.79,720.34) v1(610.79,677.47) v1(610.79,634.59) v1(610.79,591.72) v1(610.79,548.85) v1(610.79,505.98) v1(610.79,463.11) v1(610.79,420.24) v1(610.79,377.36) v1(610.79,334.49) v1(610.79,291.62) v1(610.79,248.75) v1(610.79,205.88) v1(610.79,163.01) v1(275,163.01)
  PWR w18: v1(158.01,163.01) v1(120.7,163.01) v1(83.39,163.01) v1(46.08,163.01) v1(8.77,163.01) v1(-28.54,163.01) v1(-28.54,291.67) v1(-28.54,334.56) v1(-28.54,634.79) v1(-28.54,677.67) v1(-28.54,935.01) v1(-28.54,977.9) v1(-28.54,1278.12) v1(-28.54,1321.01) v1(-28.54,1363.9) v1(-28.54,1406.79) v1(-28.54,1449.67) v1(6.33,1484.54) v1(50.11,1484.54) v1(93.88,1484.54) v1(137.66,1484.54) v1(181.43,1484.54) v1(225.21,1484.54) v1(268.98,1484.54) v1(312.76,1484.54) v1(356.53,1484.54) v1(400.31,1484.54) v1(444.08,1484.54) v1(487.86,1484.54) v1(531.63,1484.54) v1(575.41,1484.54) v1(610.79,1449.15) v1(610.79,1406.28) v1(610.79,1363.41) v1(610.79,1320.54) v1(610.79,1277.67) v1(610.79,1234.8) v1(610.79,1191.92) v1(610.79,1149.05) v1(610.79,1106.18) v1(610.79,1063.31) v1(610.79,1020.44) v1(610.79,977.57) v1(610.79,934.69) v1(610.79,891.82) v1(610.79,848.95) v1(610.79,806.08) v1(610.79,763.21) v1(610.79,720.34) v1(610.79,677.47) v1(610.79,634.59) v1(610.79,591.72) v1(610.79,548.85) v1(610.79,505.98) v1(610.79,463.11) v1(610.79,420.24) v1(610.79,377.36) v1(610.79,334.49) v1(610.79,291.62) v1(610.79,248.75) v1(610.79,205.88) v1(610.79,163.01) v1(275,163.01)
  Bottom Layer 1 w18: v1(158.01,163.01) v1(120.7,163.01) v1(83.39,163.01) v1(46.08,163.01) v1(8.77,163.01) v1(-28.54,163.01) v1(-28.54,291.67) v1(-28.54,334.56) v1(-28.54,634.79) v1(-28.54,677.67) v1(-28.54,935.01) v1(-28.54,977.9) v1(-28.54,1278.12) v1(-28.54,1321.01) v1(-28.54,1363.9) v1(-28.54,1406.79) v1(-28.54,1449.67) v1(6.33,1484.54) v1(50.11,1484.54) v1(93.88,1484.54) v1(137.66,1484.54) v1(181.43,1484.54) v1(225.21,1484.54) v1(268.98,1484.54) v1(312.76,1484.54) v1(356.53,1484.54) v1(400.31,1484.54) v1(444.08,1484.54) v1(487.86,1484.54) v1(531.63,1484.54) v1(575.41,1484.54) v1(610.79,1449.15) v1(610.79,1406.28) v1(610.79,1363.41) v1(610.79,1320.54) v1(610.79,1277.67) v1(610.79,1234.8) v1(610.79,1191.92) v1(610.79,1149.05) v1(610.79,1106.18) v1(610.79,1063.31) v1(610.79,1020.44) v1(610.79,977.57) v1(610.79,934.69) v1(610.79,891.82) v1(610.79,848.95) v1(610.79,806.08) v1(610.79,763.21) v1(610.79,720.34) v1(610.79,677.47) v1(610.79,634.59) v1(610.79,591.72) v1(610.79,548.85) v1(610.79,505.98) v1(610.79,463.11) v1(610.79,420.24) v1(610.79,377.36) v1(610.79,334.49) v1(610.79,291.62) v1(610.79,248.75) v1(610.79,205.88) v1(610.79,163.01) v1(275,163.01) ; C17.2 232.3,212.74 243.62,212.74 v1(249.37,206.99)
  Bottom Layer 1 w20: C14.2 428.67,503.42 v1(428.67,510.55)
  other v1: 312.31,163.01 349.62,163.01 386.93,163.01 424.24,163.01 461.55,163.01 498.86,163.01 536.17,163.01 573.48,163.01 -28.54,205.9 14.34,205.9 57.21,205.9 100.08,205.9 439.31,207.94 482.18,207.94 525.05,207.94 567.92,207.94 -28.54,248.79 14.34,248.77 57.21,248.77 525.05,255.66 567.92,255.66 101.96,269.2 439.31,270.19 482.18,270.19 14.34,291.64 525.05,303.37 567.92,303.37 525.05,351.09 567.92,351.09 227.07,371.48 266.61,371.48 308.14,371.49 349.68,371.48 -28.54,377.45 525.05,398.8 567.92,398.8 227.07,410.36 266.61,410.35 308.14,410.36 349.68,410.35 -28.54,420.34 567.92,441.67 473.6,446.47 73.7,449.29 116.57,449.29 227.07,449.23 267.61,449.23 308.14,449.23 348.68,449.23 -28.54,463.23 508.3,470.17 508.3,503.7 541.82,503.7 -28.54,506.12 508.3,537.22 541.82,537.22 -28.54,549.01 240.98,586.65 -28.54,591.9 184.46,594.49 155.63,610.64 317.08,657.34 261.97,667.75 222.06,685.46 501.01,709.19 -28.54,720.56 476.94,720.86 14.34,724.56 61.03,724.56 -28.54,763.45 14.34,763.45 572.65,805.2 -28.54,806.34 39.47,817.93 -28.54,849.23 180.94,851.82 231.88,851.82 281.67,851.82 -28.54,892.12 421.15,894.12 180.94,905.93 231.88,905.93 281.67,907.93 419.13,925.45 180.94,960.04 231.88,960.04 281.67,960.04 -28.54,1020.79 354.73,1058.99 -28.54,1063.67 -28.54,1106.56 178.4,1139.4 -28.54,1149.45 9.39,1149.45 53.32,1153.45 332.47,1174.24 -28.54,1192.34 363.94,1231.16 433.45,1231.07 468.21,1231.03 -28.54,1235.23 537.76,1265.7 572.52,1265.65 363.98,1265.91 433.49,1265.83 468.25,1265.78 503,1265.74 468.29,1300.54 503.05,1300.5 537.8,1300.45 572.56,1300.41 6.22,1320.96 40.98,1320.92 75.73,1320.88 572.6,1335.17 6.26,1355.72 572.65,1369.92 6.31,1390.48 6.35,1425.23
IO21: H1.7 U3.42 | length 306
  Top Layer 1 w5.5: v1(129.72,475.91) 132.11,473.52 132.11,467.02 170.52,428.6 U3.42
  Bottom Layer 1 w5.5: H1.7 135.92,620.13 135.92,485.38 129.72,479.17 v1(129.72,475.91)
IO22: H1.8 U3.39 | length 350.4
  Top Layer 1 w5.5: H1.8 63.54,700.91 96.74,700.91 124.77,672.88 124.77,613.75 182.5,556.03 182.5,471.13 183.69,469.94 U3.39
MSCLK: R8.1 U1.28 | length 732.4
  Top Layer 1 w5.5: v1(81.39,777.34) 83.43,777.34 133.97,827.89 133.97,846.38 U1.28
  Bottom Layer 1 w5.5: v1(81.39,777.34) 83.78,774.95 83.78,767.6 211.28,640.1 293.41,640.1 365.1,568.41 395.9,568.41 450.45,513.86 450.45,397.48 437.11,384.14 R8.1@416.97,384.14
NetA1_1: A1.1 U3.2 | length 233
  Top Layer 1 w8: 213.09,263.24 U3.2
  Top Layer 1 w15: 213.09,191.32 213.09,263.24
  Top Layer 1 w20: A1.1 213.09,191.32
NetC1_1: C1.1 U1.8 U1.11 | length 204
  Top Layer 1 w6.72: U1.11 333.09,907.75 v1(348.23,907.75) ; C1.1 332.59,767.83 U1.8 333.2,848.76 355.52,848.76 v1@360.13,853.38
  Bottom Layer 1 w6.72: v1(348.23,907.75) 348.23,861.27 v1(360.13,849.38)
NetC5_1: C5.1 U1.6 X1.3 | length 221.5
  Top Layer 1 w5.5: X1.3 207.83,645.11 227.72,665 246.7,683.98 246.7,735.18 C5.1 229.74,762.5 242.24,762.5 272.51,792.77 272.51,807.77 U1.6
NetC7_1: C7.1 U1.7 X1.1 | length 121.3
  Top Layer 1 w5.5: X1.1 287.76,708.1 267.87,727.99 C7.1 293.26,782.72 U1.7
NetC15_1: C15.1 L1.2 U3.3 U3.4 | length 97.3
  Top Layer 1 w8: U3.3 226.87,288.02 v1(238.13,276.76) 238.13,279.47 240.65,281.99 U3.4
  Bottom Layer 1 w8: v1(238.13,276.76) 238.13,279.47 242.77,284.1 242.77,288.35 C15.1
NetC19_1: C19.1 U3.44 X2.1 | length 199.4
  Top Layer 1 w5.5: X2.1@13.43,416.7 33.31,396.81 33.53,396.81 52.03,378.32 103.07,378.32 108.41,383.66 C19.1@117.63,392.88 ; X2.1@17.43,417.7 X2.1@17.43,422.62 ; C19.1 191.55,399.97 U3.44
NetC20_1: C20.1 U3.45 X2.3 | length 137.8
  Top Layer 1 w5.5: X2.3 77.43,336.02 104.08,336.02 154.08,386.02 176.2,386.02 176.26,386.08 179.43,386.08 180.61,387.26 U3.45
NetC21_1: C21.1 R7.1 U3.47 | length 155.7
  Top Layer 1 w5.5: v1(156.79,330.95) 158.49,332.65 158.49,342.64 174.37,358.52 191.43,358.52 U3.47
  Bottom Layer 1 w10: R7.1 90.72,323.8 95.56,328.64 97.54,328.64 113.98,345.08 142.66,345.08 v1(156.79,330.95) 158.1,332.26 175.58,332.26 C21.1
NetC21_2: C21.2 C22.1 R7.2 U3.48 | length 155.4
  Top Layer 1 w5.5: v1(167.04,304.03) 168.81,305.81 178.66,305.81 187.63,314.78 187.63,344.74 188.81,345.92 U3.48
  Bottom Layer 1 w10: R7.2 130.09,323.48 134.93,318.64 135.09,318.64 149.69,304.03 v1(167.04,304.03)
  Bottom Layer 1 w15: v1(167.04,304.03) C21.2 C22.1
NetD1_A: D1.A J2.1
NetD2_A: D2.A R9.2 | length 43.7
  Top Layer 1 w8: D2.A R9.2
NetR1_1: R1.1 R4.1 U1.15 | length 128.6
  Top Layer 1 w5.5: U1.15 388.85,1005.68 389.19,1006.01 R4.1 ; R1.1 389.19,1005.68
NetR3_1: R3.1 U1.1 | length 95.9
  Top Layer 1 w5.5: R3.1 113.47,779.53 142.77,808.83 U1.1
NetR8_2: R8.2 U3.12 | length 222.9
  Top Layer 1 w5.5: U3.12 349.7,310.48 349.7,277.07 363.11,263.66 v1(390.62,263.66)
  Bottom Layer 1 w5.5: R8.2 377.51,377.05 377.51,373.63 362.45,358.57 362.45,318.55 390.15,290.85 390.15,264.13 v1(390.62,263.66)
RXD0: H1.5 U3.40 | length 223.3
  Top Layer 1 w5.5: H1.5 86.44,621.71 163.48,544.67 163.48,465.35 172.37,456.46 192.33,456.46 U3.40
SD_3V3: C18.1 C27.1 J1.4 U7.5
  other v1: 582.36,921.63 582.36,956.09 582.36,990.55 558.26,1123.98 587.42,1165.54
SD_CDZ: U1.13 U3.15 | length 932.5
  Top Layer 1 w5.5: U1.13 364.17,946.65 375.11,957.59 496.15,957.59 523.35,930.39 523.35,929.96 v1(576.45,876.87) ; U3.15 435.45,345.92 v1(557.89,468.36)
  Bottom Layer 1 w5.5: v1(557.89,468.36) 589.4,499.87 589.4,861.54 576.45,874.49 v1(576.45,876.87)
SD_CLK: J1.5 U1.22 U2.3 | length 1058.6
  Top Layer 1 w5.5: v1(135.88,988.31) 136.08,988.1 U1.22@136.08,966.35 ; U2.3 451.35,659.89 456.74,665.28 v1(456.74,668.66)
  Bottom Layer 1 w5.5: v1(135.88,988.31) v1@138.63,988.31 ; v1@137.95,988.31 176.35,988.31 299.05,865.61 299.05,832.16 454.35,676.85 454.35,671.05 v1(456.74,668.66) ; v1@137.95,990.16 137.95,993.76 139.54,995.35 139.54,1003.12 196.87,1060.45 259.65,1060.45 375.75,944.35 375.75,891.29 389.66,877.37 487,877.37 J1.5
SD_CS/D3: J1.2 U1.26 U2.8 | length 1531.4
  Top Layer 1 w5.5: v1(106.56,956.75) 105.38,957.92 82.25,957.92 68.29,943.96 68.29,902.57 83.66,887.2 v1(113.34,887.2) 113.52,887.37 135.57,887.37 U1.26 ; U2.8 553.71,738.25 561.88,730.09 v1(561.88,728.78)
  Bottom Layer 1 w5.5: v1(106.56,956.75) 155.32,956.75 256.41,855.65 256.41,845.24 449.84,651.81 484.91,651.81 v1(561.88,728.78) ; v1(113.34,887.2) 99.2,887.2 72.05,914.34 72.05,997.43 169.43,1094.81 344.49,1094.81 424.15,1015.15 J1.2
SD_D1: J1.8 U1.18 | length 441.4
  Top Layer 1 w5.5: U1.18 234.16,1023.8 v1(235.93,1025.57)
  Bottom Layer 1 w5.5: v1(235.93,1025.57) 238.03,1023.47 247.22,1023.47 331.49,939.2 331.49,854.04 430.18,755.35 J1.8
SD_D2: J1.1 U1.27 | length 705.1
  Top Layer 1 w6.72: v1(110.7,863.31) 113.75,863.31 117.47,867.03 134.92,867.03 U1.27
  Bottom Layer 1 w5.5: v1(110.7,863.31) 92.16,863.31 57.74,897.73 57.74,1010.4 155.55,1108.21 361.1,1108.21 410.87,1058.45 J1.1
SD_MISO/D0: J1.7 U1.19 U2.12 | length 971.7
  Top Layer 1 w5.5: v1(213.6,1032.53) 214.03,1032.09 214.03,1006.11 U1.19 ; v1(422.46,734.21) 451.35,763.1 U2.12
  Bottom Layer 1 w5.5: v1(422.46,734.21) 422.46,735.83 314.56,843.74 314.56,901.8 213.6,1002.76 v1(213.6,1032.53) 226.76,1045.69 249.75,1045.69 364.98,930.46 364.98,873.18 377.16,861 377.16,837.4 415.91,798.65 J1.7
SD_MOSI/CMD: J1.3 U1.24 U2.6 | length 1226.3
  Top Layer 1 w5.5: v1@90.49,926.72 135.51,926.72 U1.24 ; U2.6 528.39,614.45 v1(528.39,655.58)
  Bottom Layer 1 w5.5: J1.3 403.19,971.86 295.44,1079.6 184.64,1079.6 89.81,984.77 89.81,927.36 v1(90.47,926.7) 132.28,926.7 301.14,757.84 301.14,718.33 386.52,632.94 505.75,632.94 v1(528.39,655.58)
SD_Power: U3.24 U7.3 | length 1278.8
  Top Layer 1 w5.5: v1(365.03,1172.95) 386.59,1172.95 U7.3 ; U3.24 436.72,469.94 v1(467.2,500.42)
  Bottom Layer 1 w5.5: v1(365.03,1172.95) 365.03,1171.39 316.29,1122.65 139.7,1122.65 38.96,1021.91 38.96,885.17 110.47,813.66 230.47,813.66 290.64,753.5 290.64,712.99 469.59,534.04 469.59,502.81 v1(467.2,500.42)
SD_Reset: U1.14 U3.16 | length 932.4
  Top Layer 1 w5.5: U1.14 359.76,966.35 363.7,970.29 507.81,970.29 566.41,911.69 566.41,911.5 594.04,883.86 594.04,529.78 423.97,359.7 U3.16
Select: R6.2 U2.1 U2.4 U2.10 U3.14 | length 1092.4
  Top Layer 1 w5.5: U3.14 393.7,311.67 407.36,325.33 v1(410.24,325.33) ; U2.1@402.17,614.19 402.17,659.55 423.17,680.54 443.49,680.54 451.57,688.62 466.43,688.62 478.94,676.1 U2.4@478.94,614.19 ; U2.4 476.26,613.51 v1(476.26,576.83) 478.78,576.83 485.73,569.88 559.74,569.88 571.09,581.23 571.09,668.06 502.53,736.62 U2.10
  Bottom Layer 1 w5.5: R6.2@386.05,341.35 386.05,323.87 404.04,305.88 453.16,305.88 490.34,343.06 490.34,562.75 v1(476.26,576.83) ; R6.2 386.05,343.6 388.31,341.35 393.14,341.35 409.16,325.33 v1(410.24,325.33)
TXD0: H1.3 U3.41 | length 203.5
  Top Layer 1 w5.5: H1.3 113.28,571.71 147.27,537.72 147.27,466.7 171.59,442.38 U3.41
USB_N: J2.2 U1.4 | length 980.8
  Top Layer 1 w5.6: U1.4 234.16,785.37 v1(235.81,783.73)
  Bottom Layer 1 w5.6: v1(235.81,783.73) 235.81,780.45 229.61,774.25 229.61,745.54 208.37,724.3 159.19,724.3 10.23,873.26 10.23,1041.54 137.24,1168.55 231.25,1168.55 285.3,1222.6 285.3,1280.43 257.37,1308.36 J2.2
USB_P: J2.3 U1.3 | length 945.7
  Top Layer 1 w5.6: v1(212.82,783.73) 214.46,785.37 U1.3
  Bottom Layer 1 w5.6: v1(212.82,783.73) 212.82,780.45 219.01,774.25 219.01,749.93 203.98,734.9 163.58,734.9 20.83,877.65 20.83,1037.15 141.63,1157.95 235.65,1157.95 295.9,1218.21 295.9,1280.43 J2.3
USER_SW: SW1.1 U3.13 | length 1208.3
  Top Layer 1 w5.5: U3.13 365.85,310.48 365.85,284.6 v1(367.24,283.21)
  Bottom Layer 1 w5.5: v1(53.31,1226.79) 33.36,1206.84 33.36,1100.16 -6.6,1060.2 -6.6,839.62 205.11,627.9 281.27,627.9 345.82,563.36 345.82,508.37 329.17,491.72 329.17,363.64 341.19,351.62 341.19,309.26 v1@365.24,285.21
VDD_SDIO: C14.1 U3.26 | length 99.6
  Top Layer 1 w8: U3.26 364.67,523.02 370.78,529.14 395.73,529.14 v1(397.02,527.84)
  Bottom Layer 1 w8: C14.1 398.52,512.65 398.52,526.34 v1(397.02,527.84)
pads on no net: A1.2 J2. SW1. SW1.2 SW1.3 U1.9 U1.12 U1.20 U1.21 U1.23 U1.25 U3.5 U3.6 U3.7 U3.8 U3.10 U3.11 U3.17 U3.18 U3.20 U3.21 U3.22 U3.25 U3.27 U3.28 U3.29 U3.30 U3.31 U3.32 U3.33 U5.4 U7.4

## Polygon pours and split planes (outlines as drawn)
GND on Top Layer 1 "NONET_L-01_P-001" (solid, remove dead copper, pour order 19): 610.79,163.01 -28.54,163.01 -28.54,1449.67 6.33,1484.54 575.41,1484.54 610.79,1449.15
3V3 on Top Layer 1 "NONET_L-01_P-001" (solid, pour order 2): 247.88,1178.96 238,1169.08 238,1141.16 209.48,1112.65 209.48,1092.07 209.32,1091.91 209.32,1046.63 232.95,1046.63 232.95,1086.79 258.8,1112.65 292.66,1112.65 308.72,1128.71 308.72,1171.07 300.83,1178.96
SD_3V3 on Top Layer 1 "NONET_L-01_P-001" (solid, pour order 10): 516.95,1000.1 527.27,1010.42 580.12,1010.42 595.37,995.17 595.37,917.22 588.05,909.91 580.33,909.91 516.95,973.29
SD_3V3 on Top Layer 1 "NONET_L-01_P-001" (solid, pour order 8): 591.33,1115.35 522.61,1046.63 470.42,1046.63 450.91,1046.63 450.91,1091.91 512.43,1091.91 552.46,1131.94 552.46,1162.83 559.55,1169.92 585.4,1169.92 591.33,1163.99
3V3 on Top Layer 1 "NONET_L-01_P-001" (solid, pour order 4): 450.91,1148.99 450.91,1194.27 483.54,1226.9 529.69,1226.9 540.6,1215.99 540.6,1177.81 532.37,1169.59 495.12,1169.59 474.53,1148.99
EXT_5V on Top Layer 1 "NONET_L-01_P-001" (solid, pour order 1): 232.95,1149.08 232.95,1170.57 247.28,1184.91 301.18,1184.91 307.81,1191.54 307.81,1232.82 282.24,1258.39 215.29,1258.39 171.58,1214.68 142.46,1214.68 134.52,1206.73 134.52,1148.99 158.14,1148.99 158.14,1191.77 165.93,1199.56 201.18,1199.56 209.32,1191.42 209.32,1148.99 232.85,1148.99
NetD1_A on Top Layer 1 "NONET_L-01_P-001" (solid, pour order 0): 127.31,1221.92 104.68,1244.55 104.68,1334.61 130.84,1360.77 162.66,1360.77 190.01,1333.42 190.01,1248.95 162.98,1221.92
EXT_5V on PWR "NONET_L-01_P-001" (solid, pour order 3): 258.49,1268.94 252.75,1268.94 224.56,1240.75 161.27,1240.75 128,1207.48 128,1189.06 135.64,1181.42 303.13,1181.42 310.32,1188.61 310.32,1254.38 295.76,1268.94
SD_3V3 on PWR "NONET_L-01_P-001" (solid, pour order 5): 591.33,908.53 573.66,890.87 573.55,890.97 541.14,890.97 517.12,914.99 517.12,980.41 517.12,1096.6 526.83,1106.31 552.46,1131.94 552.46,1162.83 559.55,1169.92 582.2,1169.92 591.33,1160.79 591.33,1082.67
3V3 on PWR "NONET_L-01_P-001" (solid, pour order 20): -28.54,1449.67 6.33,1484.54 575.41,1484.54 610.79,1449.15 610.79,163.01 -28.54,163.01
GND on GND "NONET_L-01_P-001" (solid, pour order 7): 610.79,163.01 610.79,1449.15 575.41,1484.54 6.33,1484.54 -28.54,1449.67 -28.54,163.01
GND on Bottom Layer 1 "NONET_L-01_P-001" (solid, remove dead copper, pour order 12): 610.79,163.01 -28.54,163.01 -28.54,1449.67 6.33,1484.54 575.41,1484.54 610.79,1449.15
NetC15_1 on Bottom Layer 1 "NONET_L-01_P-001" (solid, pour order 9): 227.59,299.19 227.59,242.73 228.72,241.6 231.29,239.03 261.01,239.03 266.97,244.98 266.97,298.45 261.38,304.03 232.43,304.03
3V3 on Bottom Layer 1 "NONET_L-01_P-001" (solid, pour order 18): 303.51,249.02 324.9,227.62 324.9,203.04 312.33,190.47 273.35,190.47 263.82,200.01 263.82,232.55 272.16,240.89 272.16,301.57 274.63,304.03 294.32,304.03 303.51,294.84
SD_3V3 on Bottom Layer 1 "NONET_L-01_P-001" (solid, pour order 17): 565.24,959.01 564.95,959.3 564.95,991.55 574.62,1001.22 586.93,1001.22 596.15,992 596.15,917.84 582.96,904.66 569.53,904.66 556.39,917.8 437.79,917.8 437.79,949.3 555.52,949.3

## Other copper
Top Layer 1:
  pour cut-out: 51.17,296.3 48.78,298.7 48.78,302.45 98.7,302.45 104.06,307.81 104.06,333.49 139.43,333.49 142.44,330.48 142.44,308.85 164.32,286.96 169.02,282.27 169.02,276.69 167.04,164.34 167.04,261.15 134.57,293.62 134.57,327.14 114.88,327.14 114.88,306.29 104.89,296.3
  pour cut-out: 445.39,1088.01 445.39,1044.8 448.79,1041.4 443.05,1041.4 439.33,1045.12 439.33,1090.79 446.15,1097.6 509.9,1097.6 512.56,1094.95 452.33,1094.95
  pour cut-out: 125.47,1189.96 96.32,1219.1 116.74,1219.1 129.93,1205.91 129.93,1143.58 158.14,1143.58 163.55,1189.53 163.55,1140.95 158.47,1135.86 125.47,1135.86
  pour cut-out: 129.52,1096.91 188.33,1096.91 204.07,1112.65 145.26,1112.65
  pour cut-out: 130.93,1043.04 60.39,972.5 60.39,947.23 76.67,963.51 204.32,1043.04
  pour cut-out: 204.32,1143.99 204.32,1112.9 222.76,1131.34 222.76,1133.58
  pour cut-out: 282.24,1258.39 235.33,1258.39 194.87,1298.86 194.87,1266.31 204.08,1257.09
  pour cut-out: 48.88,1284.22 99.27,1334.61 99.27,1287.17 96.32,1284.22
  pour cut-out: 314.12,1234.17 311.64,1236.65 310.97,1235.97 310.97,1196.48 307.81,1191.54 307.81,1171.98 308.72,1171.07 314.12,1171.07
  pour cut-out: 238.76,731.95 206.86,763.86 206.86,766.99 204.23,769.61 171.96,769.61 164.49,762.14 161.78,759.43 161.78,746.93 157.33,742.48 96.46,742.48 67.46,771.49 67.46,781.38 68.03,781.33 108.38,821.68 60.39,902.57 60.39,770.88 102.07,729.2 160.58,729.2 164.49,733.12 164.49,759.21 172.27,766.99 194.95,766.99 198.12,763.82 198.12,753.49 220.64,730.97 230.47,730.97 238.76,722.68
  pour cut-out: 506.31,688.22 524.96,669.58 522.97,669.58 506.31,686.23 462.86,706.89 462.86,735.06 485.09,757.29 494.63,757.29 494.34,756.99 494.34,748.03 482.62,748.03 466.31,731.72 466.31,728.27 506.31,688.27
  pour cut-out: 300.56,779.69 312.21,779.69 324.07,767.83 323.4,767.17 297.4,767.17
  pour cut-out: 357.95,742.48 358.1,742.32 358.1,696.93 363.08,696.93 390.12,723.97 371.62,742.48
  pour cut-out: 357.95,742.48 361.62,738.8
  pour cut-out: 534.34,1162.2 547.2,1149.34 551.9,1149.34 577.41,1174.85 577.41,1175.33 541.92,1175.33 534.34,1167.75
  pour cut-out: 240.92,244.03 246.63,249.74 304.62,249.74 310.83,255.95 310.83,264.74 242.89,264.74 228.39,250.24 228.39,163.01 265.39,162.82 265.39,175.68 240.85,200.22 240.92,200.28
  pour cut-out: 415.34,519.96 415.34,505.85 424.05,497.15 434.6,497.15 440.82,503.37 440.82,521.46 437.77,524.51 419.9,524.51
  pour cut-out: 230.56,672.75 136.08,672.75 132.84,675.98 227.33,675.98
  pour cut-out: 39.88,367.73 48.78,358.83 51.44,361.49 51.44,367.73 25.11,394.06 -9.21,394.06 -9.21,449.18 36.06,449.18 41.06,454.18 36.75,458.5 -9.9,458.5 -14.21,454.18 -14.21,388.22 6.28,367.73
  pour cut-out: 134.11,439.04 134.57,438.58 134.57,429.5 124.57,429.5 114.72,419.65 139.47,419.65 143.15,423.33 143.15,445.1 76.56,511.69 13.41,511.69 13.41,535.69 28.95,551.23 58.34,551.23 63.41,556.29 63.41,585.69 52.08,597.03 39.25,597.03 39.25,597.12 14.65,621.71 9.65,666.8 9.65,600.99 19.82,590.82 42.16,590.82 50.59,582.39 50.59,561.95 41.91,553.27 19.47,553.27 5.44,539.25 5.44,515.7 25.45,495.69 88,495.41 134.57,448.85 134.57,439.5
  pour cut-out: 258.7,831.56 265.48,838.45 303.06,838.45 303.06,976.25 264.8,976.25 259.38,981.67 259.38,1014.42 262.85,1017.89 262.85,995.11 274.38,983.58 303.16,983.58 310.49,976.25 310.49,832.46 308.97,830.94 297.36,830.94 269.46,830.94 262.85,824.32 262.85,798.87 258.7,794.49
  pour cut-out: 248.35,796.63 242.84,802.14 242.84,826.55 163.58,826.55 152.7,837.43 152.7,987.07 244.88,987.07 244.88,982.03 239.01,976.15 165.27,976.15 165.27,838.35 242.16,838.35 248.35,832.16
GND:
  pour cut-out: 42.57,593.7 59.65,576.62 76.74,593.7 91.94,593.7 109.02,576.62 109.02,681.94 88.82,702.14 18.78,702.14 9.64,692.99 9.64,611.5 27.43,593.7
  pour cut-out: 42.57,593.7 59.65,576.62 76.74,593.7 91.94,593.7 109.02,576.62 109.02,681.94 88.82,702.14 18.78,702.14 9.64,692.99 9.64,611.5 27.43,593.7
PWR:
  pour cut-out: 48.26,540.03 64.65,523.64 64.65,534.45 14.09,585.02 14.09,685.69 105.26,685.69 90.29,700.67 11.84,700.67 0.74,689.58 0.74,548.17 8.88,540.03
  pour cut-out: 559.55,1175.33 582.2,1175.33 596.52,1189.65 596.52,1170.33 594.45,1168.25 591.52,1168.25 586.03,1173.74
Bottom Layer 1:
  pour cut-out: 437.8,831.19 437.8,868.88 422.04,868.88 407.9,854.74
  pour cut-out: 405.44,969.56 405.44,954.91 389.98,939.45
  pour cut-out: 243.11,1009.77 248.98,1009.77 253.89,1014.68 236.25,1014.68 233.15,1011.57 228.2,999.33 234.57,992.97 235.8,992.97 235.8,1002.46
  pour cut-out: 192.23,1014.9 205.7,1014.9 205.7,1021.43 202.23,1024.9 173.24,1024.9 167.44,1019.1 181.94,993.89 181.94,1004.61
  pour cut-out: 349.64,476.89 349.64,476.83 337.52,464.71 337.07,465.16 337.07,476.89 336.53,476.89 331.02,482.39 349.19,500.56 362.76,500.56 362.76,476.89
  pour cut-out: 405.8,503.5 405.8,490.24 392.44,476.89 392.44,509.41 411.02,527.98 424.83,527.98 430.48,522.33 416.3,522.33
  pour cut-out: 458.35,397.48 462.78,393.05 479.48,393.05 482.06,395.64 482.06,396.77
  pour cut-out: 59.65,576.62 48.26,588.02 48.26,557.79 26.89,557.79 3.83,534.73 3.83,499.33 14.74,488.42 39.88,488.42 59.65,508.2
  pour cut-out: -5.88,654.02 -5.88,611.92 20.42,585.63 48.26,585.63 48.26,588.02 39.25,597.03
  pour cut-out: 144.25,507.2 143.82,506.77 143.82,485.38 165.77,507.33 194.21,507.2 244.27,507.2 260,491.47 304.21,491.47 304.21,491.35 321.15,474.41 321.27,474.52 321.27,491.72 293.82,519.16 156.21,519.16
  pour cut-out: 71.77,384.53 71.77,308.85 78,302.62 106.95,302.62 110.4,299.17 110.4,277.78 137.35,250.83 216.48,250.83 216.48,263.25 192.15,263.25 184.55,255.65 149.24,255.65 131.95,272.94 125.24,272.94 115.24,282.94 115.24,302.62 109.22,308.64 85.87,308.64 75.87,318.64 75.87,332.38 82.14,338.64 93.12,338.64 117.87,363.39 117.87,399.47 159.86,441.46 189.54,441.46 192.35,444.28 187.33,449.29 136.53,449.29
  pour cut-out: 202.9,318.72 192.35,329.28 192.35,444.28 186.73,438.65 186.73,320.21 197.9,309.03 318.23,309.03 331.5,322.3 331.5,323.72 326.5,318.72

## Silkscreen, mask and mechanical layers (free items; w line width, h text height)
Top Overlay:
  circle w5: c55.32,77.75 r57.33
  circle w5: c525.88,77.75 r57.33
  text "User Bt" at -6.54,988.29 h25
Bottom Overlay:
  drawing of 5 lines, arcs and shapes, not listed
  text "Maypole V1.3" at 455.14,23.77 h25
Mechanical 1:
  lines w1: 290.6,207.7 290.6,261.78
  lines w5: -43.59,43.59 -43.59,1454.95 -21.79,1476.75 0,1498.54 581.21,1498.54 624.79,1454.95 624.79,43.59 581.21,0 0,0 -43.59,43.59
Mechanical 15:
  lines w1: 68.82,1365.23 509.56,1365.23 509.56,2089.71 68.82,2089.71 68.82,1365.23

## Dimensions
0,1498.54 to 581.21,1498.54 on Mechanical 1
0,0 to 0,1498.54 on Mechanical 1